# EAGLE board SparkFun_Tri_Axis_Accel_Breakout-LIS331_Panel_v12 (EAGLE 7.4.0), part 1 of 3
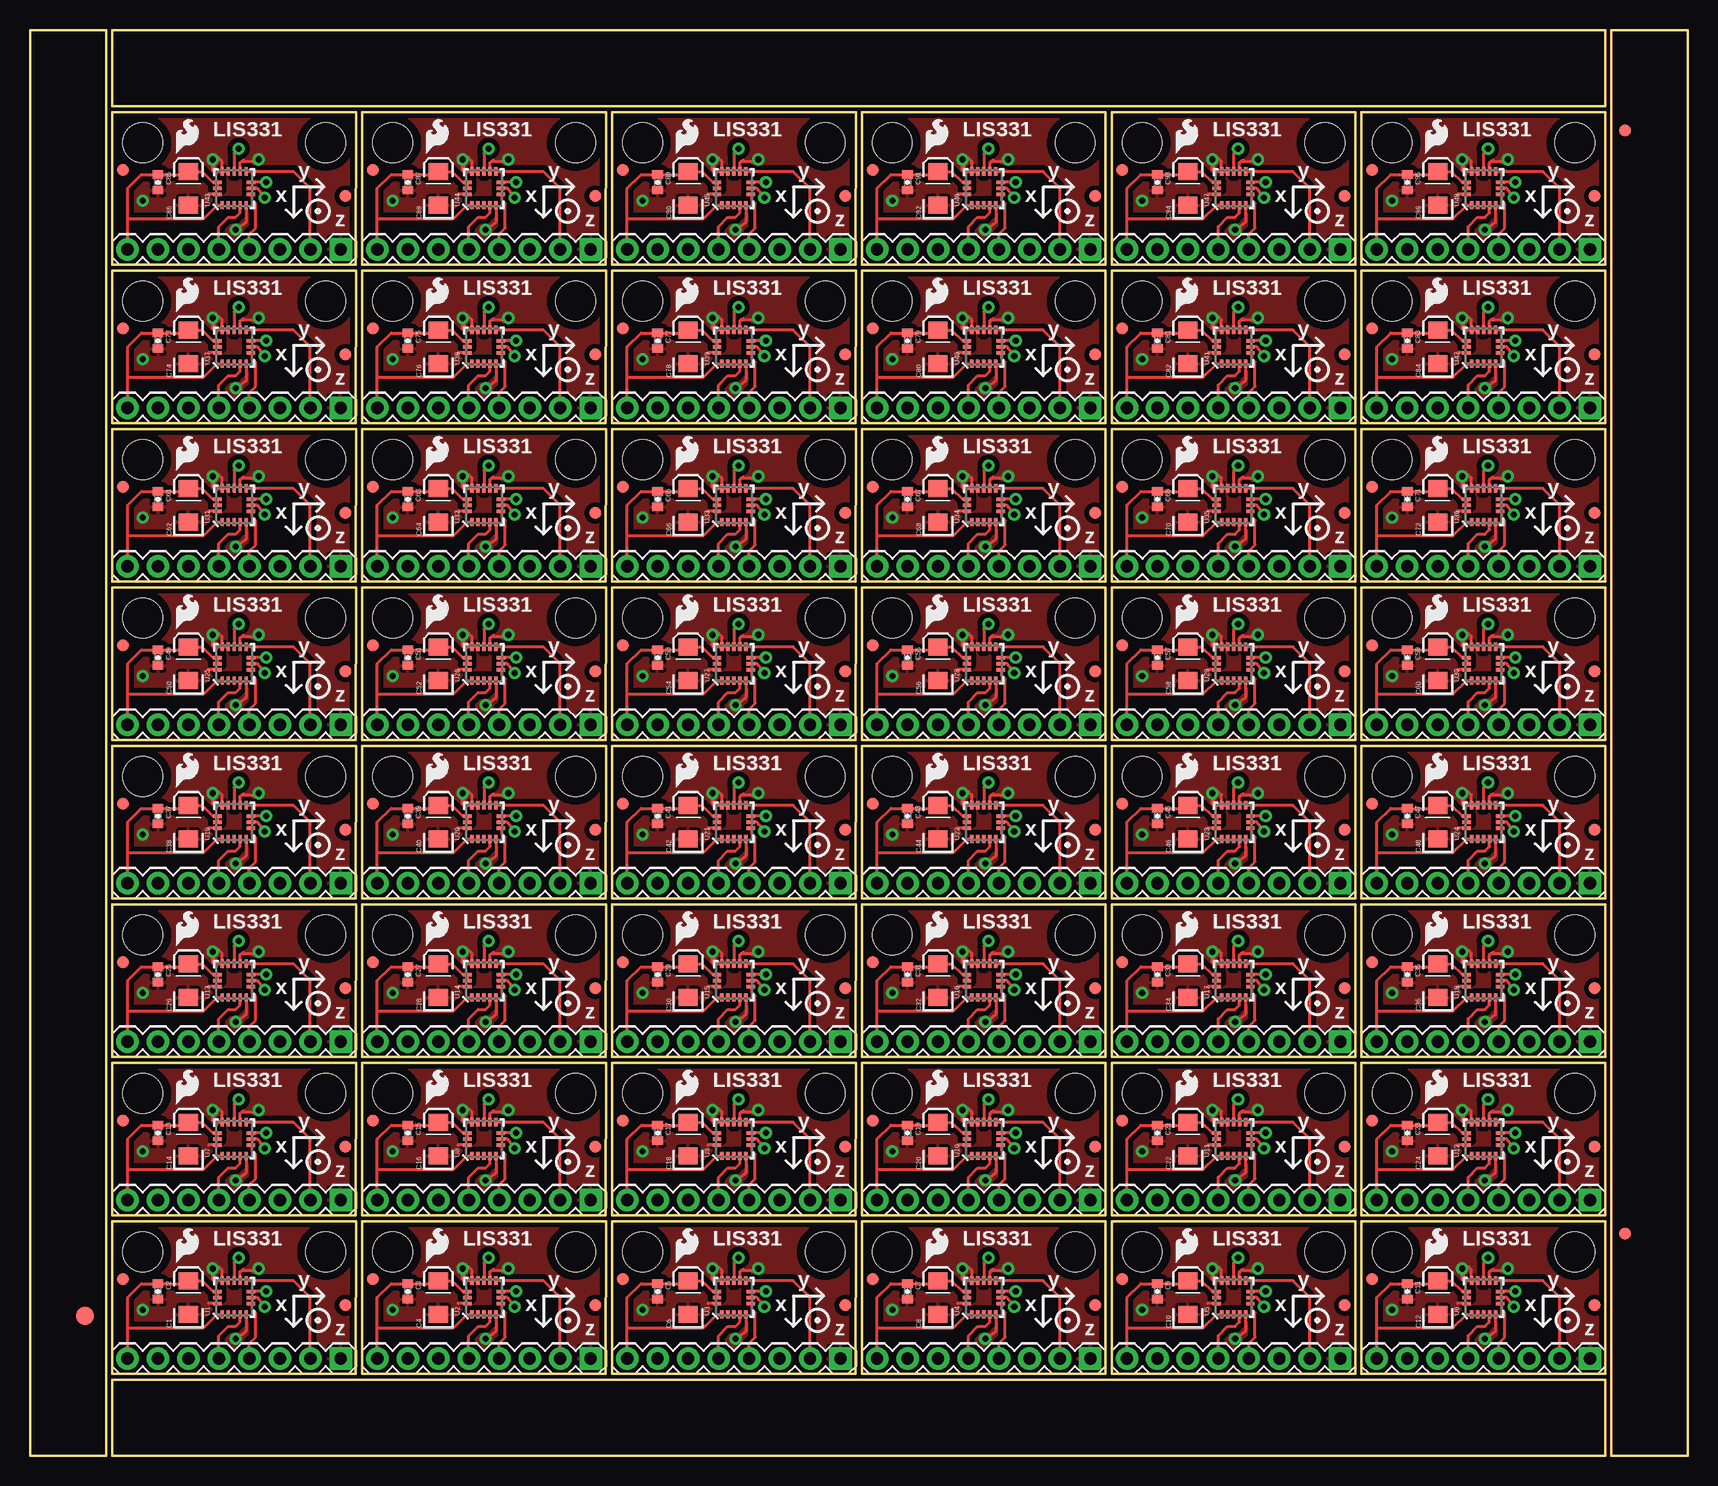
[diagram p0: board, top side]
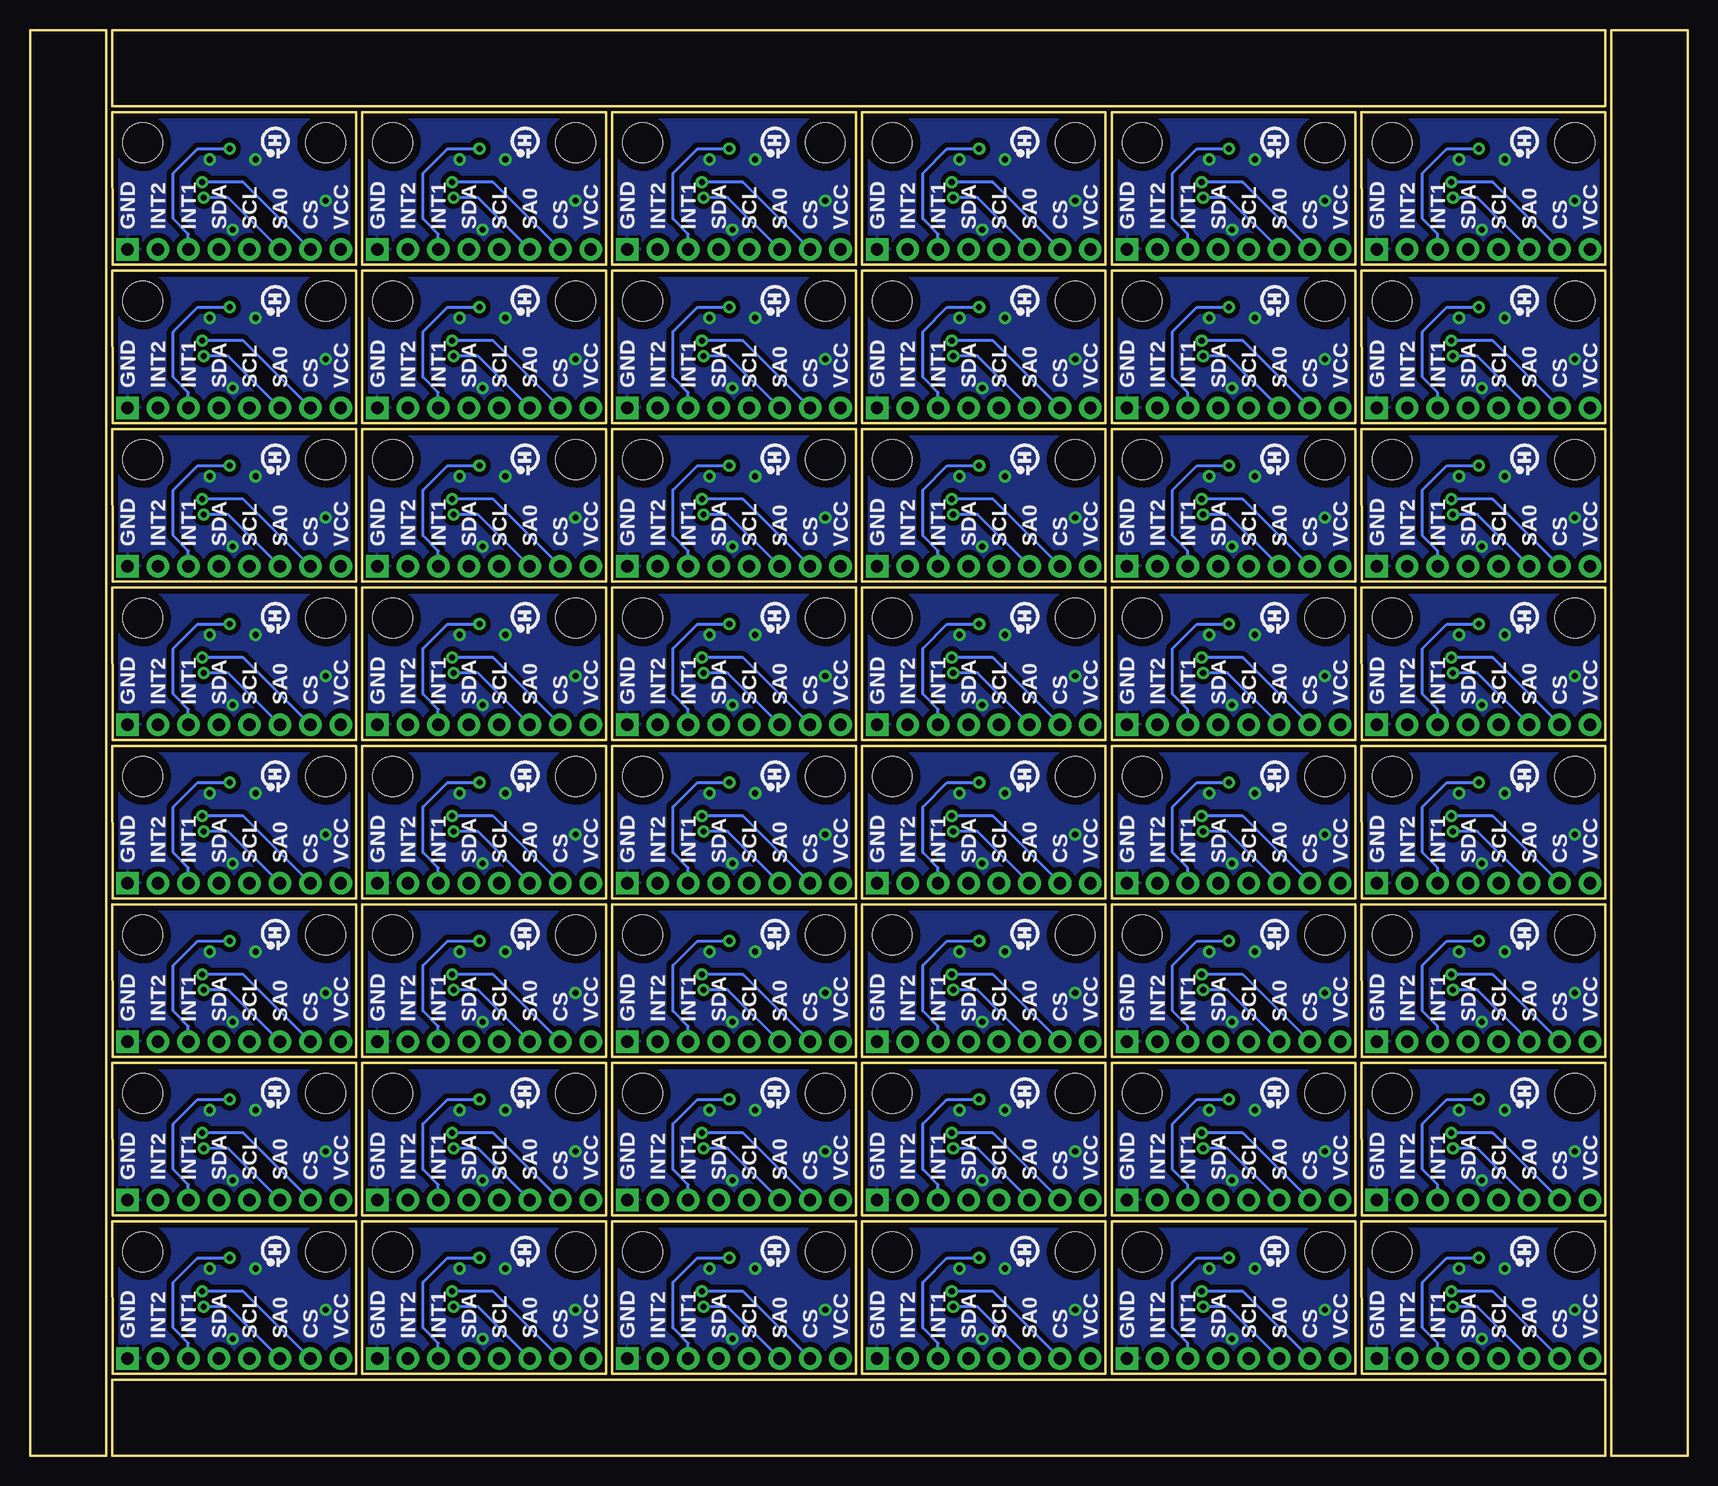
[diagram p1: board, bottom side, seen from below]

Size 138.18 x 118.87 mm. Coordinates in mm from the lower left corner, seen from the top.
Outline: 216 segments
Copper layers (1*16): Top 0.035mm / dielectric 1.5mm / Bottom 0.035mm
Design rules "SparkFun": minimum track width 8mil, minimum drill 20mil, track to track 8mil, track to pad 8mil, pad to pad 8mil, via to via 8mil, smd to smd 8mil, copper to edge 8mil, drill to drill 8mil, minimum pad ring 12mil, minimum via ring 10mil, stop-mask expansion 4mil, vias tented up to drill 20mil, thermal gap 10mil

## Footprints (pad centres in the part's own frame; a part is rotated, then mirrored left to right if it is on the bottom)
EIA3216 = smd 1.4 x 1.6: A 1.4,0; C -1.4,0
0402-CAP = smd 0.7 x 0.9: 1 -0.65,0; 2 0.65,0
FIDUCIAL-1.5X3 = smd 1.5 x 1.5: 1 0,0
FIDUCIAL-1X2 = smd 1 x 1: 1 0,0
1X08 = drill 1.016 pad 1.88 square: 1 0,0 | drill 1.016 pad 1.88: 2 2.54,0; 3 5.08,0; 4 7.62,0; 5 10.16,0; 6 12.7,0; 7 15.24,0; 8 17.78,0
STAND-OFF = hole 3.302: 0,0
LGA16-3MM = smd 0.7 x 0.28: 1 -1.4,1; 2 -1.4,0.5; 3 -1.4,0; 4 -1.4,-0.5; 5 -1.4,-1; 9 1.4,-1; 10 1.4,-0.5; 11 1.4,0; 12 1.4,0.5; 13 1.4,1 | smd 0.28 x 0.7: 6 -0.5,-1.4; 7 0,-1.4; 8 0.5,-1.4; 14 0.5,1.4; 15 0,1.4; 16 -0.5,1.4

## Placement (x,y rotation side)
C1  10uF  [EIA3216]  13.21,13.21 90 top
C2  0.1uF  [0402-CAP]  10.67,13.72 270 top
C3  0.1uF  [0402-CAP]  31.5,13.72 270 top
C4  10uF  [EIA3216]  34.04,13.21 90 top
C5  0.1uF  [0402-CAP]  52.32,13.72 270 top
C6  10uF  [EIA3216]  54.86,13.21 90 top
C7  0.1uF  [0402-CAP]  73.15,13.72 270 top
C8  10uF  [EIA3216]  75.69,13.21 90 top
C9  0.1uF  [0402-CAP]  93.98,13.72 270 top
C10  10uF  [EIA3216]  96.52,13.21 90 top
C11  0.1uF  [0402-CAP]  114.81,13.72 270 top
C12  10uF  [EIA3216]  117.35,13.21 90 top
C13  0.1uF  [0402-CAP]  10.67,26.92 270 top
C14  10uF  [EIA3216]  13.21,26.42 90 top
C15  0.1uF  [0402-CAP]  31.5,26.92 270 top
C16  10uF  [EIA3216]  34.04,26.42 90 top
C17  0.1uF  [0402-CAP]  52.32,26.92 270 top
C18  10uF  [EIA3216]  54.86,26.42 90 top
C19  0.1uF  [0402-CAP]  73.15,26.92 270 top
C20  10uF  [EIA3216]  75.69,26.42 90 top
C21  0.1uF  [0402-CAP]  93.98,26.92 270 top
C22  10uF  [EIA3216]  96.52,26.42 90 top
C23  0.1uF  [0402-CAP]  114.81,26.92 270 top
C24  10uF  [EIA3216]  117.35,26.42 90 top
C25  0.1uF  [0402-CAP]  10.67,40.13 270 top
C26  10uF  [EIA3216]  13.21,39.62 90 top
C27  0.1uF  [0402-CAP]  31.5,40.13 270 top
C28  10uF  [EIA3216]  34.04,39.62 90 top
C29  0.1uF  [0402-CAP]  52.32,40.13 270 top
C30  10uF  [EIA3216]  54.86,39.62 90 top
C31  0.1uF  [0402-CAP]  73.15,40.13 270 top
C32  10uF  [EIA3216]  75.69,39.62 90 top
C33  0.1uF  [0402-CAP]  93.98,40.13 270 top
C34  10uF  [EIA3216]  96.52,39.62 90 top
C35  0.1uF  [0402-CAP]  114.81,40.13 270 top
C36  10uF  [EIA3216]  117.35,39.62 90 top
C37  0.1uF  [0402-CAP]  10.67,53.34 270 top
C38  10uF  [EIA3216]  13.21,52.83 90 top
C39  0.1uF  [0402-CAP]  31.5,53.34 270 top
C40  10uF  [EIA3216]  34.04,52.83 90 top
C41  0.1uF  [0402-CAP]  52.32,53.34 270 top
C42  10uF  [EIA3216]  54.86,52.83 90 top
C43  0.1uF  [0402-CAP]  73.15,53.34 270 top
C44  10uF  [EIA3216]  75.69,52.83 90 top
C45  0.1uF  [0402-CAP]  93.98,53.34 270 top
C46  10uF  [EIA3216]  96.52,52.83 90 top
C47  0.1uF  [0402-CAP]  114.81,53.34 270 top
C48  10uF  [EIA3216]  117.35,52.83 90 top
C49  0.1uF  [0402-CAP]  10.67,66.55 270 top
C50  10uF  [EIA3216]  13.21,66.04 90 top
C51  0.1uF  [0402-CAP]  31.5,66.55 270 top
C52  10uF  [EIA3216]  34.04,66.04 90 top
C53  0.1uF  [0402-CAP]  52.32,66.55 270 top
C54  10uF  [EIA3216]  54.86,66.04 90 top
C55  0.1uF  [0402-CAP]  73.15,66.55 270 top
C56  10uF  [EIA3216]  75.69,66.04 90 top
C57  0.1uF  [0402-CAP]  93.98,66.55 270 top
C58  10uF  [EIA3216]  96.52,66.04 90 top
C59  0.1uF  [0402-CAP]  114.81,66.55 270 top
C60  10uF  [EIA3216]  117.35,66.04 90 top
C61  0.1uF  [0402-CAP]  10.67,79.76 270 top
C62  10uF  [EIA3216]  13.21,79.25 90 top
C63  0.1uF  [0402-CAP]  31.5,79.76 270 top
C64  10uF  [EIA3216]  34.04,79.25 90 top
C65  0.1uF  [0402-CAP]  52.32,79.76 270 top
C66  10uF  [EIA3216]  54.86,79.25 90 top
C67  0.1uF  [0402-CAP]  73.15,79.76 270 top
C68  10uF  [EIA3216]  75.69,79.25 90 top
C69  0.1uF  [0402-CAP]  93.98,79.76 270 top
C70  10uF  [EIA3216]  96.52,79.25 90 top
C71  0.1uF  [0402-CAP]  114.81,79.76 270 top
C72  10uF  [EIA3216]  117.35,79.25 90 top
C73  0.1uF  [0402-CAP]  10.67,92.96 270 top
C74  10uF  [EIA3216]  13.21,92.46 90 top
C75  0.1uF  [0402-CAP]  31.5,92.96 270 top
C76  10uF  [EIA3216]  34.04,92.46 90 top
C77  0.1uF  [0402-CAP]  52.32,92.96 270 top
C78  10uF  [EIA3216]  54.86,92.46 90 top
C79  0.1uF  [0402-CAP]  73.15,92.96 270 top
C80  10uF  [EIA3216]  75.69,92.46 90 top
C81  0.1uF  [0402-CAP]  93.98,92.96 270 top
C82  10uF  [EIA3216]  96.52,92.46 90 top
C83  0.1uF  [0402-CAP]  114.81,92.96 270 top
C84  10uF  [EIA3216]  117.35,92.46 90 top
C85  0.1uF  [0402-CAP]  10.67,106.17 270 top
C86  10uF  [EIA3216]  13.21,105.66 90 top
C87  0.1uF  [0402-CAP]  31.5,106.17 270 top
C88  10uF  [EIA3216]  34.04,105.66 90 top
C89  0.1uF  [0402-CAP]  52.32,106.17 270 top
C90  10uF  [EIA3216]  54.86,105.66 90 top
C91  0.1uF  [0402-CAP]  73.15,106.17 270 top
C92  10uF  [EIA3216]  75.69,105.66 90 top
C93  0.1uF  [0402-CAP]  93.98,106.17 270 top
C94  10uF  [EIA3216]  96.52,105.66 90 top
C95  0.1uF  [0402-CAP]  114.81,106.17 270 top
C96  10uF  [EIA3216]  117.35,105.66 90 top
E$1  [FIDUCIAL-1.5X3]  4.57,11.68 0 top
E$5  [FIDUCIAL-1X2]  132.97,18.54 0 top
E$6  [FIDUCIAL-1X2]  132.97,110.49 180 top
JP1  [1X08]  25.91,8.13 180 top
JP2  LOGO-SFESK  [SFE-LOGO-FLAME]  12.19,16.13 0 top
JP3  STAND-OFF  [STAND-OFF]  9.4,17.02 0 top
JP4  STAND-OFF  [STAND-OFF]  24.64,17.02 0 top
JP5  FIDUCIAL1X2  [FIDUCIAL-1X2]  7.75,14.73 0 top
JP6  FIDUCIAL1X2  [FIDUCIAL-1X2]  26.29,12.57 0 top
JP7  LOGO-SFESK  [SFE-LOGO-FLAME]  33.02,16.13 0 top
JP8  [1X08]  46.74,8.13 180 top
JP9  STAND-OFF  [STAND-OFF]  30.23,17.02 0 top
JP10  STAND-OFF  [STAND-OFF]  45.47,17.02 0 top
JP11  FIDUCIAL1X2  [FIDUCIAL-1X2]  28.57,14.73 0 top
JP12  FIDUCIAL1X2  [FIDUCIAL-1X2]  47.12,12.57 0 top
JP13  LOGO-SFESK  [SFE-LOGO-FLAME]  53.85,16.13 0 top
JP14  [1X08]  67.56,8.13 180 top
JP15  STAND-OFF  [STAND-OFF]  51.05,17.02 0 top
JP16  STAND-OFF  [STAND-OFF]  66.29,17.02 0 top
JP17  FIDUCIAL1X2  [FIDUCIAL-1X2]  49.4,14.73 0 top
JP18  FIDUCIAL1X2  [FIDUCIAL-1X2]  67.94,12.57 0 top
JP19  LOGO-SFESK  [SFE-LOGO-FLAME]  74.68,16.13 0 top
JP20  [1X08]  88.39,8.13 180 top
JP21  STAND-OFF  [STAND-OFF]  71.88,17.02 0 top
JP22  STAND-OFF  [STAND-OFF]  87.12,17.02 0 top
JP23  FIDUCIAL1X2  [FIDUCIAL-1X2]  70.23,14.73 0 top
JP24  FIDUCIAL1X2  [FIDUCIAL-1X2]  88.77,12.57 0 top
JP25  LOGO-SFESK  [SFE-LOGO-FLAME]  95.5,16.13 0 top
JP26  [1X08]  109.22,8.13 180 top
JP27  STAND-OFF  [STAND-OFF]  92.71,17.02 0 top
JP28  STAND-OFF  [STAND-OFF]  107.95,17.02 0 top
JP29  FIDUCIAL1X2  [FIDUCIAL-1X2]  91.06,14.73 0 top
JP30  FIDUCIAL1X2  [FIDUCIAL-1X2]  109.6,12.57 0 top
JP31  LOGO-SFESK  [SFE-LOGO-FLAME]  116.33,16.13 0 top
JP32  [1X08]  130.05,8.13 180 top
JP33  STAND-OFF  [STAND-OFF]  113.54,17.02 0 top
JP34  STAND-OFF  [STAND-OFF]  128.78,17.02 0 top
JP35  FIDUCIAL1X2  [FIDUCIAL-1X2]  111.89,14.73 0 top
JP36  FIDUCIAL1X2  [FIDUCIAL-1X2]  130.43,12.57 0 top
JP37  LOGO-SFESK  [SFE-LOGO-FLAME]  12.19,29.34 0 top
JP38  [1X08]  25.91,21.34 180 top
JP39  STAND-OFF  [STAND-OFF]  9.4,30.23 0 top
JP40  STAND-OFF  [STAND-OFF]  24.64,30.23 0 top
JP41  FIDUCIAL1X2  [FIDUCIAL-1X2]  7.75,27.94 0 top
JP42  FIDUCIAL1X2  [FIDUCIAL-1X2]  26.29,25.78 0 top
JP43  LOGO-SFESK  [SFE-LOGO-FLAME]  33.02,29.34 0 top
JP44  [1X08]  46.74,21.34 180 top
JP45  STAND-OFF  [STAND-OFF]  30.23,30.23 0 top
JP46  STAND-OFF  [STAND-OFF]  45.47,30.23 0 top
JP47  FIDUCIAL1X2  [FIDUCIAL-1X2]  28.57,27.94 0 top
JP48  FIDUCIAL1X2  [FIDUCIAL-1X2]  47.12,25.78 0 top
JP49  LOGO-SFESK  [SFE-LOGO-FLAME]  53.85,29.34 0 top
JP50  [1X08]  67.56,21.34 180 top
JP51  STAND-OFF  [STAND-OFF]  51.05,30.23 0 top
JP52  STAND-OFF  [STAND-OFF]  66.29,30.23 0 top
JP53  FIDUCIAL1X2  [FIDUCIAL-1X2]  49.4,27.94 0 top
JP54  FIDUCIAL1X2  [FIDUCIAL-1X2]  67.94,25.78 0 top
JP55  LOGO-SFESK  [SFE-LOGO-FLAME]  74.68,29.34 0 top
JP56  [1X08]  88.39,21.34 180 top
JP57  STAND-OFF  [STAND-OFF]  71.88,30.23 0 top
JP58  STAND-OFF  [STAND-OFF]  87.12,30.23 0 top
JP59  FIDUCIAL1X2  [FIDUCIAL-1X2]  70.23,27.94 0 top
JP60  FIDUCIAL1X2  [FIDUCIAL-1X2]  88.77,25.78 0 top
JP61  LOGO-SFESK  [SFE-LOGO-FLAME]  95.5,29.34 0 top
JP62  [1X08]  109.22,21.34 180 top
JP63  STAND-OFF  [STAND-OFF]  92.71,30.23 0 top
JP64  STAND-OFF  [STAND-OFF]  107.95,30.23 0 top
JP65  FIDUCIAL1X2  [FIDUCIAL-1X2]  91.06,27.94 0 top
JP66  FIDUCIAL1X2  [FIDUCIAL-1X2]  109.6,25.78 0 top
JP67  LOGO-SFESK  [SFE-LOGO-FLAME]  116.33,29.34 0 top
JP68  [1X08]  130.05,21.34 180 top
JP69  STAND-OFF  [STAND-OFF]  113.54,30.23 0 top
JP70  STAND-OFF  [STAND-OFF]  128.78,30.23 0 top
JP71  FIDUCIAL1X2  [FIDUCIAL-1X2]  111.89,27.94 0 top
JP72  FIDUCIAL1X2  [FIDUCIAL-1X2]  130.43,25.78 0 top
JP73  LOGO-SFESK  [SFE-LOGO-FLAME]  12.19,42.55 0 top
JP74  [1X08]  25.91,34.54 180 top
JP75  STAND-OFF  [STAND-OFF]  9.4,43.43 0 top
JP76  STAND-OFF  [STAND-OFF]  24.64,43.43 0 top
JP77  FIDUCIAL1X2  [FIDUCIAL-1X2]  7.75,41.15 0 top
JP78  FIDUCIAL1X2  [FIDUCIAL-1X2]  26.29,38.99 0 top
JP79  LOGO-SFESK  [SFE-LOGO-FLAME]  33.02,42.55 0 top
JP80  [1X08]  46.74,34.54 180 top
JP81  STAND-OFF  [STAND-OFF]  30.23,43.43 0 top
JP82  STAND-OFF  [STAND-OFF]  45.47,43.43 0 top
JP83  FIDUCIAL1X2  [FIDUCIAL-1X2]  28.57,41.15 0 top
JP84  FIDUCIAL1X2  [FIDUCIAL-1X2]  47.12,38.99 0 top
JP85  LOGO-SFESK  [SFE-LOGO-FLAME]  53.85,42.55 0 top
JP86  [1X08]  67.56,34.54 180 top
JP87  STAND-OFF  [STAND-OFF]  51.05,43.43 0 top
JP88  STAND-OFF  [STAND-OFF]  66.29,43.43 0 top
JP89  FIDUCIAL1X2  [FIDUCIAL-1X2]  49.4,41.15 0 top
JP90  FIDUCIAL1X2  [FIDUCIAL-1X2]  67.94,38.99 0 top
JP91  LOGO-SFESK  [SFE-LOGO-FLAME]  74.68,42.55 0 top
JP92  [1X08]  88.39,34.54 180 top
JP93  STAND-OFF  [STAND-OFF]  71.88,43.43 0 top
JP94  STAND-OFF  [STAND-OFF]  87.12,43.43 0 top
JP95  FIDUCIAL1X2  [FIDUCIAL-1X2]  70.23,41.15 0 top
JP96  FIDUCIAL1X2  [FIDUCIAL-1X2]  88.77,38.99 0 top
JP97  LOGO-SFESK  [SFE-LOGO-FLAME]  95.5,42.55 0 top
JP98  [1X08]  109.22,34.54 180 top
JP99  STAND-OFF  [STAND-OFF]  92.71,43.43 0 top
JP100  STAND-OFF  [STAND-OFF]  107.95,43.43 0 top
JP101  FIDUCIAL1X2  [FIDUCIAL-1X2]  91.06,41.15 0 top
JP102  FIDUCIAL1X2  [FIDUCIAL-1X2]  109.6,38.99 0 top
JP103  LOGO-SFESK  [SFE-LOGO-FLAME]  116.33,42.55 0 top
JP104  [1X08]  130.05,34.54 180 top
JP105  STAND-OFF  [STAND-OFF]  113.54,43.43 0 top
JP106  STAND-OFF  [STAND-OFF]  128.78,43.43 0 top
JP107  FIDUCIAL1X2  [FIDUCIAL-1X2]  111.89,41.15 0 top
JP108  FIDUCIAL1X2  [FIDUCIAL-1X2]  130.43,38.99 0 top
JP109  LOGO-SFESK  [SFE-LOGO-FLAME]  12.19,55.75 0 top
JP110  [1X08]  25.91,47.75 180 top
JP111  STAND-OFF  [STAND-OFF]  9.4,56.64 0 top
JP112  STAND-OFF  [STAND-OFF]  24.64,56.64 0 top
JP113  FIDUCIAL1X2  [FIDUCIAL-1X2]  7.75,54.36 0 top
JP114  FIDUCIAL1X2  [FIDUCIAL-1X2]  26.29,52.2 0 top
JP115  LOGO-SFESK  [SFE-LOGO-FLAME]  33.02,55.75 0 top
JP116  [1X08]  46.74,47.75 180 top
JP117  STAND-OFF  [STAND-OFF]  30.23,56.64 0 top
JP118  STAND-OFF  [STAND-OFF]  45.47,56.64 0 top
JP119  FIDUCIAL1X2  [FIDUCIAL-1X2]  28.57,54.36 0 top
JP120  FIDUCIAL1X2  [FIDUCIAL-1X2]  47.12,52.2 0 top
JP121  LOGO-SFESK  [SFE-LOGO-FLAME]  53.85,55.75 0 top
JP122  [1X08]  67.56,47.75 180 top
JP123  STAND-OFF  [STAND-OFF]  51.05,56.64 0 top
JP124  STAND-OFF  [STAND-OFF]  66.29,56.64 0 top
JP125  FIDUCIAL1X2  [FIDUCIAL-1X2]  49.4,54.36 0 top
JP126  FIDUCIAL1X2  [FIDUCIAL-1X2]  67.94,52.2 0 top
JP127  LOGO-SFESK  [SFE-LOGO-FLAME]  74.68,55.75 0 top
JP128  [1X08]  88.39,47.75 180 top
JP129  STAND-OFF  [STAND-OFF]  71.88,56.64 0 top
JP130  STAND-OFF  [STAND-OFF]  87.12,56.64 0 top
JP131  FIDUCIAL1X2  [FIDUCIAL-1X2]  70.23,54.36 0 top
JP132  FIDUCIAL1X2  [FIDUCIAL-1X2]  88.77,52.2 0 top
JP133  LOGO-SFESK  [SFE-LOGO-FLAME]  95.5,55.75 0 top
JP134  [1X08]  109.22,47.75 180 top
JP135  STAND-OFF  [STAND-OFF]  92.71,56.64 0 top
JP136  STAND-OFF  [STAND-OFF]  107.95,56.64 0 top
JP137  FIDUCIAL1X2  [FIDUCIAL-1X2]  91.06,54.36 0 top
JP138  FIDUCIAL1X2  [FIDUCIAL-1X2]  109.6,52.2 0 top
JP139  LOGO-SFESK  [SFE-LOGO-FLAME]  116.33,55.75 0 top
JP140  [1X08]  130.05,47.75 180 top
JP141  STAND-OFF  [STAND-OFF]  113.54,56.64 0 top
JP142  STAND-OFF  [STAND-OFF]  128.78,56.64 0 top
JP143  FIDUCIAL1X2  [FIDUCIAL-1X2]  111.89,54.36 0 top
JP144  FIDUCIAL1X2  [FIDUCIAL-1X2]  130.43,52.2 0 top
JP145  LOGO-SFESK  [SFE-LOGO-FLAME]  12.19,68.96 0 top
JP146  [1X08]  25.91,60.96 180 top
JP147  STAND-OFF  [STAND-OFF]  9.4,69.85 0 top
JP148  STAND-OFF  [STAND-OFF]  24.64,69.85 0 top
JP149  FIDUCIAL1X2  [FIDUCIAL-1X2]  7.75,67.56 0 top
JP150  FIDUCIAL1X2  [FIDUCIAL-1X2]  26.29,65.41 0 top
JP151  LOGO-SFESK  [SFE-LOGO-FLAME]  33.02,68.96 0 top
JP152  [1X08]  46.74,60.96 180 top
JP153  STAND-OFF  [STAND-OFF]  30.23,69.85 0 top
JP154  STAND-OFF  [STAND-OFF]  45.47,69.85 0 top
JP155  FIDUCIAL1X2  [FIDUCIAL-1X2]  28.57,67.56 0 top
JP156  FIDUCIAL1X2  [FIDUCIAL-1X2]  47.12,65.41 0 top
JP157  LOGO-SFESK  [SFE-LOGO-FLAME]  53.85,68.96 0 top
JP158  [1X08]  67.56,60.96 180 top
JP159  STAND-OFF  [STAND-OFF]  51.05,69.85 0 top
JP160  STAND-OFF  [STAND-OFF]  66.29,69.85 0 top
JP161  FIDUCIAL1X2  [FIDUCIAL-1X2]  49.4,67.56 0 top
JP162  FIDUCIAL1X2  [FIDUCIAL-1X2]  67.94,65.41 0 top
JP163  LOGO-SFESK  [SFE-LOGO-FLAME]  74.68,68.96 0 top
JP164  [1X08]  88.39,60.96 180 top
JP165  STAND-OFF  [STAND-OFF]  71.88,69.85 0 top
JP166  STAND-OFF  [STAND-OFF]  87.12,69.85 0 top
JP167  FIDUCIAL1X2  [FIDUCIAL-1X2]  70.23,67.56 0 top
JP168  FIDUCIAL1X2  [FIDUCIAL-1X2]  88.77,65.41 0 top
JP169  LOGO-SFESK  [SFE-LOGO-FLAME]  95.5,68.96 0 top
JP170  [1X08]  109.22,60.96 180 top
JP171  STAND-OFF  [STAND-OFF]  92.71,69.85 0 top
JP172  STAND-OFF  [STAND-OFF]  107.95,69.85 0 top
JP173  FIDUCIAL1X2  [FIDUCIAL-1X2]  91.06,67.56 0 top
JP174  FIDUCIAL1X2  [FIDUCIAL-1X2]  109.6,65.41 0 top
JP175  LOGO-SFESK  [SFE-LOGO-FLAME]  116.33,68.96 0 top
JP176  [1X08]  130.05,60.96 180 top
JP177  STAND-OFF  [STAND-OFF]  113.54,69.85 0 top
JP178  STAND-OFF  [STAND-OFF]  128.78,69.85 0 top
JP179  FIDUCIAL1X2  [FIDUCIAL-1X2]  111.89,67.56 0 top
JP180  FIDUCIAL1X2  [FIDUCIAL-1X2]  130.43,65.41 0 top
JP181  LOGO-SFESK  [SFE-LOGO-FLAME]  12.19,82.17 0 top
JP182  [1X08]  25.91,74.17 180 top
JP183  STAND-OFF  [STAND-OFF]  9.4,83.06 0 top
JP184  STAND-OFF  [STAND-OFF]  24.64,83.06 0 top
JP185  FIDUCIAL1X2  [FIDUCIAL-1X2]  7.75,80.77 0 top
JP186  FIDUCIAL1X2  [FIDUCIAL-1X2]  26.29,78.61 0 top
JP187  LOGO-SFESK  [SFE-LOGO-FLAME]  33.02,82.17 0 top
JP188  [1X08]  46.74,74.17 180 top
JP189  STAND-OFF  [STAND-OFF]  30.23,83.06 0 top
JP190  STAND-OFF  [STAND-OFF]  45.47,83.06 0 top
JP191  FIDUCIAL1X2  [FIDUCIAL-1X2]  28.57,80.77 0 top
JP192  FIDUCIAL1X2  [FIDUCIAL-1X2]  47.12,78.61 0 top
JP193  LOGO-SFESK  [SFE-LOGO-FLAME]  53.85,82.17 0 top
JP194  [1X08]  67.56,74.17 180 top
JP195  STAND-OFF  [STAND-OFF]  51.05,83.06 0 top
JP196  STAND-OFF  [STAND-OFF]  66.29,83.06 0 top
JP197  FIDUCIAL1X2  [FIDUCIAL-1X2]  49.4,80.77 0 top
JP198  FIDUCIAL1X2  [FIDUCIAL-1X2]  67.94,78.61 0 top
JP199  LOGO-SFESK  [SFE-LOGO-FLAME]  74.68,82.17 0 top
JP200  [1X08]  88.39,74.17 180 top
JP201  STAND-OFF  [STAND-OFF]  71.88,83.06 0 top
JP202  STAND-OFF  [STAND-OFF]  87.12,83.06 0 top
JP203  FIDUCIAL1X2  [FIDUCIAL-1X2]  70.23,80.77 0 top
JP204  FIDUCIAL1X2  [FIDUCIAL-1X2]  88.77,78.61 0 top
JP205  LOGO-SFESK  [SFE-LOGO-FLAME]  95.5,82.17 0 top
JP206  [1X08]  109.22,74.17 180 top
JP207  STAND-OFF  [STAND-OFF]  92.71,83.06 0 top
JP208  STAND-OFF  [STAND-OFF]  107.95,83.06 0 top
JP209  FIDUCIAL1X2  [FIDUCIAL-1X2]  91.06,80.77 0 top
JP210  FIDUCIAL1X2  [FIDUCIAL-1X2]  109.6,78.61 0 top
JP211  LOGO-SFESK  [SFE-LOGO-FLAME]  116.33,82.17 0 top
JP212  [1X08]  130.05,74.17 180 top
JP213  STAND-OFF  [STAND-OFF]  113.54,83.06 0 top
JP214  STAND-OFF  [STAND-OFF]  128.78,83.06 0 top
JP215  FIDUCIAL1X2  [FIDUCIAL-1X2]  111.89,80.77 0 top
JP216  FIDUCIAL1X2  [FIDUCIAL-1X2]  130.43,78.61 0 top
JP217  LOGO-SFESK  [SFE-LOGO-FLAME]  12.19,95.38 0 top
JP218  [1X08]  25.91,87.38 180 top
JP219  STAND-OFF  [STAND-OFF]  9.4,96.27 0 top
JP220  STAND-OFF  [STAND-OFF]  24.64,96.27 0 top
JP221  FIDUCIAL1X2  [FIDUCIAL-1X2]  7.75,93.98 0 top
JP222  FIDUCIAL1X2  [FIDUCIAL-1X2]  26.29,91.82 0 top
JP223  LOGO-SFESK  [SFE-LOGO-FLAME]  33.02,95.38 0 top
JP224  [1X08]  46.74,87.38 180 top
JP225  STAND-OFF  [STAND-OFF]  30.23,96.27 0 top
JP226  STAND-OFF  [STAND-OFF]  45.47,96.27 0 top
JP227  FIDUCIAL1X2  [FIDUCIAL-1X2]  28.57,93.98 0 top
JP228  FIDUCIAL1X2  [FIDUCIAL-1X2]  47.12,91.82 0 top
JP229  LOGO-SFESK  [SFE-LOGO-FLAME]  53.85,95.38 0 top
JP230  [1X08]  67.56,87.38 180 top
JP231  STAND-OFF  [STAND-OFF]  51.05,96.27 0 top
JP232  STAND-OFF  [STAND-OFF]  66.29,96.27 0 top
JP233  FIDUCIAL1X2  [FIDUCIAL-1X2]  49.4,93.98 0 top
JP234  FIDUCIAL1X2  [FIDUCIAL-1X2]  67.94,91.82 0 top
JP235  LOGO-SFESK  [SFE-LOGO-FLAME]  74.68,95.38 0 top
JP236  [1X08]  88.39,87.38 180 top
JP237  STAND-OFF  [STAND-OFF]  71.88,96.27 0 top
JP238  STAND-OFF  [STAND-OFF]  87.12,96.27 0 top
JP239  FIDUCIAL1X2  [FIDUCIAL-1X2]  70.23,93.98 0 top
JP240  FIDUCIAL1X2  [FIDUCIAL-1X2]  88.77,91.82 0 top
JP241  LOGO-SFESK  [SFE-LOGO-FLAME]  95.5,95.38 0 top
JP242  [1X08]  109.22,87.38 180 top
JP243  STAND-OFF  [STAND-OFF]  92.71,96.27 0 top
JP244  STAND-OFF  [STAND-OFF]  107.95,96.27 0 top
JP245  FIDUCIAL1X2  [FIDUCIAL-1X2]  91.06,93.98 0 top
JP246  FIDUCIAL1X2  [FIDUCIAL-1X2]  109.6,91.82 0 top
JP247  LOGO-SFESK  [SFE-LOGO-FLAME]  116.33,95.38 0 top
JP248  [1X08]  130.05,87.38 180 top
JP249  STAND-OFF  [STAND-OFF]  113.54,96.27 0 top
JP250  STAND-OFF  [STAND-OFF]  128.78,96.27 0 top
JP251  FIDUCIAL1X2  [FIDUCIAL-1X2]  111.89,93.98 0 top
JP252  FIDUCIAL1X2  [FIDUCIAL-1X2]  130.43,91.82 0 top
JP253  LOGO-SFESK  [SFE-LOGO-FLAME]  12.19,108.58 0 top
JP254  [1X08]  25.91,100.58 180 top
JP255  STAND-OFF  [STAND-OFF]  9.4,109.47 0 top
JP256  STAND-OFF  [STAND-OFF]  24.64,109.47 0 top
JP257  FIDUCIAL1X2  [FIDUCIAL-1X2]  7.75,107.19 0 top
JP258  FIDUCIAL1X2  [FIDUCIAL-1X2]  26.29,105.03 0 top
JP259  LOGO-SFESK  [SFE-LOGO-FLAME]  33.02,108.58 0 top
JP260  [1X08]  46.74,100.58 180 top
JP261  STAND-OFF  [STAND-OFF]  30.23,109.47 0 top
JP262  STAND-OFF  [STAND-OFF]  45.47,109.47 0 top
JP263  FIDUCIAL1X2  [FIDUCIAL-1X2]  28.57,107.19 0 top
JP264  FIDUCIAL1X2  [FIDUCIAL-1X2]  47.12,105.03 0 top
JP265  LOGO-SFESK  [SFE-LOGO-FLAME]  53.85,108.58 0 top
JP266  [1X08]  67.56,100.58 180 top
JP267  STAND-OFF  [STAND-OFF]  51.05,109.47 0 top
JP268  STAND-OFF  [STAND-OFF]  66.29,109.47 0 top
JP269  FIDUCIAL1X2  [FIDUCIAL-1X2]  49.4,107.19 0 top
JP270  FIDUCIAL1X2  [FIDUCIAL-1X2]  67.94,105.03 0 top
JP271  LOGO-SFESK  [SFE-LOGO-FLAME]  74.68,108.58 0 top
JP272  [1X08]  88.39,100.58 180 top
JP273  STAND-OFF  [STAND-OFF]  71.88,109.47 0 top
JP274  STAND-OFF  [STAND-OFF]  87.12,109.47 0 top
JP275  FIDUCIAL1X2  [FIDUCIAL-1X2]  70.23,107.19 0 top
JP276  FIDUCIAL1X2  [FIDUCIAL-1X2]  88.77,105.03 0 top
JP277  LOGO-SFESK  [SFE-LOGO-FLAME]  95.5,108.58 0 top
JP278  [1X08]  109.22,100.58 180 top
JP279  STAND-OFF  [STAND-OFF]  92.71,109.47 0 top
JP280  STAND-OFF  [STAND-OFF]  107.95,109.47 0 top
JP281  FIDUCIAL1X2  [FIDUCIAL-1X2]  91.06,107.19 0 top
JP282  FIDUCIAL1X2  [FIDUCIAL-1X2]  109.6,105.03 0 top
JP283  LOGO-SFESK  [SFE-LOGO-FLAME]  116.33,108.58 0 top
JP284  [1X08]  130.05,100.58 180 top
JP285  STAND-OFF  [STAND-OFF]  113.54,109.47 0 top
JP286  STAND-OFF  [STAND-OFF]  128.78,109.47 0 top
JP287  FIDUCIAL1X2  [FIDUCIAL-1X2]  111.89,107.19 0 top
JP288  FIDUCIAL1X2  [FIDUCIAL-1X2]  130.43,105.03 0 top
U1  LIS331  [LGA16-3MM]  17.02,13.21 90 top
U2  LIS331  [LGA16-3MM]  37.85,13.21 90 top
U3  LIS331  [LGA16-3MM]  58.67,13.21 90 top
U4  LIS331  [LGA16-3MM]  79.5,13.21 90 top
U5  LIS331  [LGA16-3MM]  100.33,13.21 90 top
U6  LIS331  [LGA16-3MM]  121.16,13.21 90 top
U7  LIS331  [LGA16-3MM]  17.02,26.42 90 top
U8  LIS331  [LGA16-3MM]  37.85,26.42 90 top
U9  LIS331  [LGA16-3MM]  58.67,26.42 90 top
U10  LIS331  [LGA16-3MM]  79.5,26.42 90 top
U11  LIS331  [LGA16-3MM]  100.33,26.42 90 top
U12  LIS331  [LGA16-3MM]  121.16,26.42 90 top
U13  LIS331  [LGA16-3MM]  17.02,39.62 90 top
U14  LIS331  [LGA16-3MM]  37.85,39.62 90 top
U15  LIS331  [LGA16-3MM]  58.67,39.62 90 top
U16  LIS331  [LGA16-3MM]  79.5,39.62 90 top
U17  LIS331  [LGA16-3MM]  100.33,39.62 90 top
U18  LIS331  [LGA16-3MM]  121.16,39.62 90 top
U19  LIS331  [LGA16-3MM]  17.02,52.83 90 top
U20  LIS331  [LGA16-3MM]  37.85,52.83 90 top
U21  LIS331  [LGA16-3MM]  58.67,52.83 90 top
U22  LIS331  [LGA16-3MM]  79.5,52.83 90 top
U23  LIS331  [LGA16-3MM]  100.33,52.83 90 top
U24  LIS331  [LGA16-3MM]  121.16,52.83 90 top
U25  LIS331  [LGA16-3MM]  17.02,66.04 90 top
U26  LIS331  [LGA16-3MM]  37.85,66.04 90 top
U27  LIS331  [LGA16-3MM]  58.67,66.04 90 top
U28  LIS331  [LGA16-3MM]  79.5,66.04 90 top
U29  LIS331  [LGA16-3MM]  100.33,66.04 90 top
U30  LIS331  [LGA16-3MM]  121.16,66.04 90 top
U31  LIS331  [LGA16-3MM]  17.02,79.25 90 top
U32  LIS331  [LGA16-3MM]  37.85,79.25 90 top
U33  LIS331  [LGA16-3MM]  58.67,79.25 90 top
U34  LIS331  [LGA16-3MM]  79.5,79.25 90 top
U35  LIS331  [LGA16-3MM]  100.33,79.25 90 top
U36  LIS331  [LGA16-3MM]  121.16,79.25 90 top
U37  LIS331  [LGA16-3MM]  17.02,92.46 90 top
U38  LIS331  [LGA16-3MM]  37.85,92.46 90 top
U39  LIS331  [LGA16-3MM]  58.67,92.46 90 top
U40  LIS331  [LGA16-3MM]  79.5,92.46 90 top
U41  LIS331  [LGA16-3MM]  100.33,92.46 90 top
U42  LIS331  [LGA16-3MM]  121.16,92.46 90 top
U43  LIS331  [LGA16-3MM]  17.02,105.66 90 top
U44  LIS331  [LGA16-3MM]  37.85,105.66 90 top
U45  LIS331  [LGA16-3MM]  58.67,105.66 90 top
U46  LIS331  [LGA16-3MM]  79.5,105.66 90 top
U47  LIS331  [LGA16-3MM]  100.33,105.66 90 top
U48  LIS331  [LGA16-3MM]  121.16,105.66 90 top
U$1  OSHW-LOGO-SMALL  [OSHW-LOGO-SMALL]  13.59,17.14 270 bottom
U$2  OSHW-LOGO-SMALL  [OSHW-LOGO-SMALL]  34.42,17.14 270 bottom
U$3  OSHW-LOGO-SMALL  [OSHW-LOGO-SMALL]  55.24,17.14 270 bottom
U$4  OSHW-LOGO-SMALL  [OSHW-LOGO-SMALL]  76.07,17.14 270 bottom
U$5  OSHW-LOGO-SMALL  [OSHW-LOGO-SMALL]  96.9,17.14 270 bottom
U$6  OSHW-LOGO-SMALL  [OSHW-LOGO-SMALL]  117.73,17.14 270 bottom
U$7  OSHW-LOGO-SMALL  [OSHW-LOGO-SMALL]  13.59,30.35 270 bottom
U$8  OSHW-LOGO-SMALL  [OSHW-LOGO-SMALL]  34.42,30.35 270 bottom
U$9  OSHW-LOGO-SMALL  [OSHW-LOGO-SMALL]  55.24,30.35 270 bottom
U$10  OSHW-LOGO-SMALL  [OSHW-LOGO-SMALL]  76.07,30.35 270 bottom
U$11  OSHW-LOGO-SMALL  [OSHW-LOGO-SMALL]  96.9,30.35 270 bottom
U$12  OSHW-LOGO-SMALL  [OSHW-LOGO-SMALL]  117.73,30.35 270 bottom
U$13  OSHW-LOGO-SMALL  [OSHW-LOGO-SMALL]  13.59,43.56 270 bottom
U$14  OSHW-LOGO-SMALL  [OSHW-LOGO-SMALL]  34.42,43.56 270 bottom
U$15  OSHW-LOGO-SMALL  [OSHW-LOGO-SMALL]  55.24,43.56 270 bottom
U$16  OSHW-LOGO-SMALL  [OSHW-LOGO-SMALL]  76.07,43.56 270 bottom
U$17  OSHW-LOGO-SMALL  [OSHW-LOGO-SMALL]  96.9,43.56 270 bottom
U$18  OSHW-LOGO-SMALL  [OSHW-LOGO-SMALL]  117.73,43.56 270 bottom
U$19  OSHW-LOGO-SMALL  [OSHW-LOGO-SMALL]  13.59,56.77 270 bottom
U$20  OSHW-LOGO-SMALL  [OSHW-LOGO-SMALL]  34.42,56.77 270 bottom
U$21  OSHW-LOGO-SMALL  [OSHW-LOGO-SMALL]  55.24,56.77 270 bottom
U$22  OSHW-LOGO-SMALL  [OSHW-LOGO-SMALL]  76.07,56.77 270 bottom
U$23  OSHW-LOGO-SMALL  [OSHW-LOGO-SMALL]  96.9,56.77 270 bottom
U$24  OSHW-LOGO-SMALL  [OSHW-LOGO-SMALL]  117.73,56.77 270 bottom
U$25  OSHW-LOGO-SMALL  [OSHW-LOGO-SMALL]  13.59,69.98 270 bottom
U$26  OSHW-LOGO-SMALL  [OSHW-LOGO-SMALL]  34.42,69.98 270 bottom
U$27  OSHW-LOGO-SMALL  [OSHW-LOGO-SMALL]  55.24,69.98 270 bottom
U$28  OSHW-LOGO-SMALL  [OSHW-LOGO-SMALL]  76.07,69.98 270 bottom
U$29  OSHW-LOGO-SMALL  [OSHW-LOGO-SMALL]  96.9,69.98 270 bottom
U$30  OSHW-LOGO-SMALL  [OSHW-LOGO-SMALL]  117.73,69.98 270 bottom
U$31  OSHW-LOGO-SMALL  [OSHW-LOGO-SMALL]  13.59,83.19 270 bottom
U$32  OSHW-LOGO-SMALL  [OSHW-LOGO-SMALL]  34.42,83.19 270 bottom
U$33  OSHW-LOGO-SMALL  [OSHW-LOGO-SMALL]  55.24,83.19 270 bottom
U$34  OSHW-LOGO-SMALL  [OSHW-LOGO-SMALL]  76.07,83.19 270 bottom
U$35  OSHW-LOGO-SMALL  [OSHW-LOGO-SMALL]  96.9,83.19 270 bottom
U$36  OSHW-LOGO-SMALL  [OSHW-LOGO-SMALL]  117.73,83.19 270 bottom
U$37  OSHW-LOGO-SMALL  [OSHW-LOGO-SMALL]  13.59,96.39 270 bottom
U$38  OSHW-LOGO-SMALL  [OSHW-LOGO-SMALL]  34.42,96.39 270 bottom
U$39  OSHW-LOGO-SMALL  [OSHW-LOGO-SMALL]  55.24,96.39 270 bottom
U$40  OSHW-LOGO-SMALL  [OSHW-LOGO-SMALL]  76.07,96.39 270 bottom
U$41  OSHW-LOGO-SMALL  [OSHW-LOGO-SMALL]  96.9,96.39 270 bottom
U$42  OSHW-LOGO-SMALL  [OSHW-LOGO-SMALL]  117.73,96.39 270 bottom
U$43  OSHW-LOGO-SMALL  [OSHW-LOGO-SMALL]  13.59,109.6 270 bottom
U$44  OSHW-LOGO-SMALL  [OSHW-LOGO-SMALL]  34.42,109.6 270 bottom
U$45  OSHW-LOGO-SMALL  [OSHW-LOGO-SMALL]  55.24,109.6 270 bottom
U$46  OSHW-LOGO-SMALL  [OSHW-LOGO-SMALL]  76.07,109.6 270 bottom
U$47  OSHW-LOGO-SMALL  [OSHW-LOGO-SMALL]  96.9,109.6 270 bottom
U$48  OSHW-LOGO-SMALL  [OSHW-LOGO-SMALL]  117.73,109.6 270 bottom

## Library data of the parts
C1-C96 JP1-JP288 U1-U48 = SparkFun
E$1 = SparkFun-Retired
E$5 E$6 = SparkFun-Aesthetics
U$1-U$48 = OSHW_small

## Nets
CS: JP1.7 U1.8
CS1: JP8.7 U2.8
CS2: JP14.7 U3.8
CS3: JP20.7 U4.8
CS4: JP26.7 U5.8
CS5: JP32.7 U6.8
CS6: JP38.7 U7.8
CS7: JP44.7 U8.8
CS8: JP50.7 U9.8
CS9: JP56.7 U10.8
CS10: JP62.7 U11.8
CS11: JP68.7 U12.8
CS12: JP74.7 U13.8
CS13: JP80.7 U14.8
CS14: JP86.7 U15.8
CS15: JP92.7 U16.8
CS16: JP98.7 U17.8
CS17: JP104.7 U18.8
CS18: JP110.7 U19.8
CS19: JP116.7 U20.8
CS20: JP122.7 U21.8
CS21: JP128.7 U22.8
CS22: JP134.7 U23.8
CS23: JP140.7 U24.8
CS24: JP146.7 U25.8
CS25: JP152.7 U26.8
CS26: JP158.7 U27.8
CS27: JP164.7 U28.8
CS28: JP170.7 U29.8
CS29: JP176.7 U30.8
CS30: JP182.7 U31.8
CS31: JP188.7 U32.8
CS32: JP194.7 U33.8
CS33: JP200.7 U34.8
CS34: JP206.7 U35.8
CS35: JP212.7 U36.8
CS36: JP218.7 U37.8
CS37: JP224.7 U38.8
CS38: JP230.7 U39.8
CS39: JP236.7 U40.8
CS40: JP242.7 U41.8
CS41: JP248.7 U42.8
CS42: JP254.7 U43.8
CS43: JP260.7 U44.8
CS44: JP266.7 U45.8
CS45: JP272.7 U46.8
CS46: JP278.7 U47.8
CS47: JP284.7 U48.8
GND: C1.C C2.2 JP1.1 U1.5 U1.10 U1.12 U1.13 U1.16
GND1: C3.2 C4.C JP8.1 U2.5 U2.10 U2.12 U2.13 U2.16
GND2: C5.2 C6.C JP14.1 U3.5 U3.10 U3.12 U3.13 U3.16
GND3: C7.2 C8.C JP20.1 U4.5 U4.10 U4.12 U4.13 U4.16
GND4: C9.2 C10.C JP26.1 U5.5 U5.10 U5.12 U5.13 U5.16
GND5: C11.2 C12.C JP32.1 U6.5 U6.10 U6.12 U6.13 U6.16
GND6: C13.2 C14.C JP38.1 U7.5 U7.10 U7.12 U7.13 U7.16
GND7: C15.2 C16.C JP44.1 U8.5 U8.10 U8.12 U8.13 U8.16
GND8: C17.2 C18.C JP50.1 U9.5 U9.10 U9.12 U9.13 U9.16
GND9: C19.2 C20.C JP56.1 U10.5 U10.10 U10.12 U10.13 U10.16
GND10: C21.2 C22.C JP62.1 U11.5 U11.10 U11.12 U11.13 U11.16
GND11: C23.2 C24.C JP68.1 U12.5 U12.10 U12.12 U12.13 U12.16
GND12: C25.2 C26.C JP74.1 U13.5 U13.10 U13.12 U13.13 U13.16
GND13: C27.2 C28.C JP80.1 U14.5 U14.10 U14.12 U14.13 U14.16
GND14: C29.2 C30.C JP86.1 U15.5 U15.10 U15.12 U15.13 U15.16
GND15: C31.2 C32.C JP92.1 U16.5 U16.10 U16.12 U16.13 U16.16
GND16: C33.2 C34.C JP98.1 U17.5 U17.10 U17.12 U17.13 U17.16
GND17: C35.2 C36.C JP104.1 U18.5 U18.10 U18.12 U18.13 U18.16
GND18: C37.2 C38.C JP110.1 U19.5 U19.10 U19.12 U19.13 U19.16
GND19: C39.2 C40.C JP116.1 U20.5 U20.10 U20.12 U20.13 U20.16
GND20: C41.2 C42.C JP122.1 U21.5 U21.10 U21.12 U21.13 U21.16
GND21: C43.2 C44.C JP128.1 U22.5 U22.10 U22.12 U22.13 U22.16
GND22: C45.2 C46.C JP134.1 U23.5 U23.10 U23.12 U23.13 U23.16
GND23: C47.2 C48.C JP140.1 U24.5 U24.10 U24.12 U24.13 U24.16
GND24: C49.2 C50.C JP146.1 U25.5 U25.10 U25.12 U25.13 U25.16
GND25: C51.2 C52.C JP152.1 U26.5 U26.10 U26.12 U26.13 U26.16
GND26: C53.2 C54.C JP158.1 U27.5 U27.10 U27.12 U27.13 U27.16
GND27: C55.2 C56.C JP164.1 U28.5 U28.10 U28.12 U28.13 U28.16
GND28: C57.2 C58.C JP170.1 U29.5 U29.10 U29.12 U29.13 U29.16
GND29: C59.2 C60.C JP176.1 U30.5 U30.10 U30.12 U30.13 U30.16
GND30: C61.2 C62.C JP182.1 U31.5 U31.10 U31.12 U31.13 U31.16
GND31: C63.2 C64.C JP188.1 U32.5 U32.10 U32.12 U32.13 U32.16
GND32: C65.2 C66.C JP194.1 U33.5 U33.10 U33.12 U33.13 U33.16
GND33: C67.2 C68.C JP200.1 U34.5 U34.10 U34.12 U34.13 U34.16
GND34: C69.2 C70.C JP206.1 U35.5 U35.10 U35.12 U35.13 U35.16
GND35: C71.2 C72.C JP212.1 U36.5 U36.10 U36.12 U36.13 U36.16
GND36: C73.2 C74.C JP218.1 U37.5 U37.10 U37.12 U37.13 U37.16
GND37: C75.2 C76.C JP224.1 U38.5 U38.10 U38.12 U38.13 U38.16
GND38: C77.2 C78.C JP230.1 U39.5 U39.10 U39.12 U39.13 U39.16
GND39: C79.2 C80.C JP236.1 U40.5 U40.10 U40.12 U40.13 U40.16
GND40: C81.2 C82.C JP242.1 U41.5 U41.10 U41.12 U41.13 U41.16
GND41: C83.2 C84.C JP248.1 U42.5 U42.10 U42.12 U42.13 U42.16
GND42: C85.2 C86.C JP254.1 U43.5 U43.10 U43.12 U43.13 U43.16
GND43: C87.2 C88.C JP260.1 U44.5 U44.10 U44.12 U44.13 U44.16
GND44: C89.2 C90.C JP266.1 U45.5 U45.10 U45.12 U45.13 U45.16
GND45: C91.2 C92.C JP272.1 U46.5 U46.10 U46.12 U46.13 U46.16
GND46: C93.2 C94.C JP278.1 U47.5 U47.10 U47.12 U47.13 U47.16
GND47: C95.2 C96.C JP284.1 U48.5 U48.10 U48.12 U48.13 U48.16
INT1: JP1.3 U1.11
INT2: JP1.2 U1.9
INT3: JP8.3 U2.11
INT4: JP8.2 U2.9
INT5: JP14.3 U3.11
INT6: JP14.2 U3.9
INT7: JP20.3 U4.11
INT8: JP20.2 U4.9
INT9: JP26.3 U5.11
INT10: JP26.2 U5.9
INT11: JP32.3 U6.11
INT12: JP32.2 U6.9
INT13: JP38.3 U7.11
INT14: JP38.2 U7.9
INT15: JP44.3 U8.11
INT16: JP44.2 U8.9
INT17: JP50.3 U9.11
INT18: JP50.2 U9.9
INT19: JP56.3 U10.11
INT20: JP56.2 U10.9
INT21: JP62.3 U11.11
INT22: JP62.2 U11.9
INT23: JP68.3 U12.11
INT24: JP68.2 U12.9
INT25: JP74.3 U13.11
INT26: JP74.2 U13.9
INT27: JP80.3 U14.11
INT28: JP80.2 U14.9
INT29: JP86.3 U15.11
INT30: JP86.2 U15.9
INT31: JP92.3 U16.11
INT32: JP92.2 U16.9
INT33: JP98.3 U17.11
INT34: JP98.2 U17.9
INT35: JP104.3 U18.11
INT36: JP104.2 U18.9
INT37: JP110.3 U19.11
INT38: JP110.2 U19.9
INT39: JP116.3 U20.11
INT40: JP116.2 U20.9
INT41: JP122.3 U21.11
INT42: JP122.2 U21.9
INT43: JP128.3 U22.11
INT44: JP128.2 U22.9
INT45: JP134.3 U23.11
INT46: JP134.2 U23.9
INT47: JP140.3 U24.11
INT48: JP140.2 U24.9
INT49: JP146.3 U25.11
INT50: JP146.2 U25.9
INT51: JP152.3 U26.11
INT52: JP152.2 U26.9
INT53: JP158.3 U27.11
INT54: JP158.2 U27.9
INT55: JP164.3 U28.11
INT56: JP164.2 U28.9
INT57: JP170.3 U29.11
INT58: JP170.2 U29.9
INT59: JP176.3 U30.11
INT60: JP176.2 U30.9
INT61: JP182.3 U31.11
INT62: JP182.2 U31.9
INT63: JP188.3 U32.11
INT64: JP188.2 U32.9
INT65: JP194.3 U33.11
INT66: JP194.2 U33.9
INT67: JP200.3 U34.11
INT68: JP200.2 U34.9
INT69: JP206.3 U35.11
INT70: JP206.2 U35.9
INT71: JP212.3 U36.11
INT72: JP212.2 U36.9
INT73: JP218.3 U37.11
INT74: JP218.2 U37.9
INT75: JP224.3 U38.11
INT76: JP224.2 U38.9
INT77: JP230.3 U39.11
INT78: JP230.2 U39.9
INT79: JP236.3 U40.11
INT80: JP236.2 U40.9
INT81: JP242.3 U41.11
INT82: JP242.2 U41.9
INT83: JP248.3 U42.11
INT84: JP248.2 U42.9
INT85: JP254.3 U43.11
INT86: JP254.2 U43.9
INT87: JP260.3 U44.11
INT88: JP260.2 U44.9
INT89: JP266.3 U45.11
INT90: JP266.2 U45.9
INT91: JP272.3 U46.11
INT92: JP272.2 U46.9
INT93: JP278.3 U47.11
INT94: JP278.2 U47.9
INT95: JP284.3 U48.11
INT96: JP284.2 U48.9
SA0: JP1.6 U1.7
SA1: JP8.6 U2.7
SA2: JP14.6 U3.7
SA3: JP20.6 U4.7
SA4: JP26.6 U5.7
SA5: JP32.6 U6.7
SA6: JP38.6 U7.7
SA7: JP44.6 U8.7
SA8: JP50.6 U9.7
SA9: JP56.6 U10.7
SA10: JP62.6 U11.7
SA11: JP68.6 U12.7
SA12: JP74.6 U13.7
SA13: JP80.6 U14.7
SA14: JP86.6 U15.7
SA15: JP92.6 U16.7
SA16: JP98.6 U17.7
SA17: JP104.6 U18.7
SA18: JP110.6 U19.7
SA19: JP116.6 U20.7
SA20: JP122.6 U21.7
SA21: JP128.6 U22.7
SA22: JP134.6 U23.7
SA23: JP140.6 U24.7
SA24: JP146.6 U25.7
SA25: JP152.6 U26.7
SA26: JP158.6 U27.7
SA27: JP164.6 U28.7
SA28: JP170.6 U29.7
SA29: JP176.6 U30.7
SA30: JP182.6 U31.7
SA31: JP188.6 U32.7
SA32: JP194.6 U33.7
SA33: JP200.6 U34.7
SA34: JP206.6 U35.7
SA35: JP212.6 U36.7
SA36: JP218.6 U37.7
SA37: JP224.6 U38.7
SA38: JP230.6 U39.7
SA39: JP236.6 U40.7
SA40: JP242.6 U41.7
SA41: JP248.6 U42.7
SA42: JP254.6 U43.7
SA43: JP260.6 U44.7
SA44: JP266.6 U45.7
SA45: JP272.6 U46.7
SA46: JP278.6 U47.7
SA47: JP284.6 U48.7
SCL: JP1.5 U1.4
SCL1: JP8.5 U2.4
SCL2: JP14.5 U3.4
SCL3: JP20.5 U4.4
SCL4: JP26.5 U5.4
SCL5: JP32.5 U6.4
SCL6: JP38.5 U7.4
SCL7: JP44.5 U8.4
SCL8: JP50.5 U9.4
SCL9: JP56.5 U10.4
SCL10: JP62.5 U11.4
SCL11: JP68.5 U12.4
SCL12: JP74.5 U13.4
SCL13: JP80.5 U14.4
SCL14: JP86.5 U15.4
SCL15: JP92.5 U16.4
SCL16: JP98.5 U17.4
SCL17: JP104.5 U18.4
SCL18: JP110.5 U19.4
SCL19: JP116.5 U20.4
SCL20: JP122.5 U21.4
SCL21: JP128.5 U22.4
SCL22: JP134.5 U23.4
SCL23: JP140.5 U24.4
SCL24: JP146.5 U25.4
SCL25: JP152.5 U26.4
SCL26: JP158.5 U27.4
SCL27: JP164.5 U28.4
SCL28: JP170.5 U29.4
SCL29: JP176.5 U30.4
SCL30: JP182.5 U31.4
SCL31: JP188.5 U32.4
SCL32: JP194.5 U33.4
SCL33: JP200.5 U34.4
SCL34: JP206.5 U35.4
SCL35: JP212.5 U36.4
SCL36: JP218.5 U37.4
SCL37: JP224.5 U38.4
SCL38: JP230.5 U39.4
SCL39: JP236.5 U40.4
SCL40: JP242.5 U41.4
SCL41: JP248.5 U42.4
SCL42: JP254.5 U43.4
SCL43: JP260.5 U44.4
SCL44: JP266.5 U45.4
SCL45: JP272.5 U46.4
SCL46: JP278.5 U47.4
SCL47: JP284.5 U48.4
SDA: JP1.4 U1.6
SDA1: JP8.4 U2.6
SDA2: JP14.4 U3.6
SDA3: JP20.4 U4.6
SDA4: JP26.4 U5.6
SDA5: JP32.4 U6.6
SDA6: JP38.4 U7.6
SDA7: JP44.4 U8.6
SDA8: JP50.4 U9.6
SDA9: JP56.4 U10.6
SDA10: JP62.4 U11.6
SDA11: JP68.4 U12.6
SDA12: JP74.4 U13.6
SDA13: JP80.4 U14.6
SDA14: JP86.4 U15.6
SDA15: JP92.4 U16.6
SDA16: JP98.4 U17.6
SDA17: JP104.4 U18.6
SDA18: JP110.4 U19.6
SDA19: JP116.4 U20.6
SDA20: JP122.4 U21.6
SDA21: JP128.4 U22.6
SDA22: JP134.4 U23.6
SDA23: JP140.4 U24.6
SDA24: JP146.4 U25.6
SDA25: JP152.4 U26.6
SDA26: JP158.4 U27.6
SDA27: JP164.4 U28.6
SDA28: JP170.4 U29.6
SDA29: JP176.4 U30.6
SDA30: JP182.4 U31.6
SDA31: JP188.4 U32.6
SDA32: JP194.4 U33.6
SDA33: JP200.4 U34.6
SDA34: JP206.4 U35.6
SDA35: JP212.4 U36.6
SDA36: JP218.4 U37.6
SDA37: JP224.4 U38.6
SDA38: JP230.4 U39.6
SDA39: JP236.4 U40.6
SDA40: JP242.4 U41.6
SDA41: JP248.4 U42.6
SDA42: JP254.4 U43.6
SDA43: JP260.4 U44.6
SDA44: JP266.4 U45.6
SDA45: JP272.4 U46.6
SDA46: JP278.4 U47.6
SDA47: JP284.4 U48.6
VCC: C1.A C2.1 JP1.8 U1.1 U1.14 U1.15
VCC1: C3.1 C4.A JP8.8 U2.1 U2.14 U2.15
VCC2: C5.1 C6.A JP14.8 U3.1 U3.14 U3.15
VCC3: C7.1 C8.A JP20.8 U4.1 U4.14 U4.15
VCC4: C9.1 C10.A JP26.8 U5.1 U5.14 U5.15
VCC5: C11.1 C12.A JP32.8 U6.1 U6.14 U6.15
VCC6: C13.1 C14.A JP38.8 U7.1 U7.14 U7.15
VCC7: C15.1 C16.A JP44.8 U8.1 U8.14 U8.15
VCC8: C17.1 C18.A JP50.8 U9.1 U9.14 U9.15
VCC9: C19.1 C20.A JP56.8 U10.1 U10.14 U10.15
VCC10: C21.1 C22.A JP62.8 U11.1 U11.14 U11.15
VCC11: C23.1 C24.A JP68.8 U12.1 U12.14 U12.15
VCC12: C25.1 C26.A JP74.8 U13.1 U13.14 U13.15
VCC13: C27.1 C28.A JP80.8 U14.1 U14.14 U14.15
VCC14: C29.1 C30.A JP86.8 U15.1 U15.14 U15.15
VCC15: C31.1 C32.A JP92.8 U16.1 U16.14 U16.15
VCC16: C33.1 C34.A JP98.8 U17.1 U17.14 U17.15
VCC17: C35.1 C36.A JP104.8 U18.1 U18.14 U18.15
VCC18: C37.1 C38.A JP110.8 U19.1 U19.14 U19.15
VCC19: C39.1 C40.A JP116.8 U20.1 U20.14 U20.15
VCC20: C41.1 C42.A JP122.8 U21.1 U21.14 U21.15
VCC21: C43.1 C44.A JP128.8 U22.1 U22.14 U22.15
VCC22: C45.1 C46.A JP134.8 U23.1 U23.14 U23.15
VCC23: C47.1 C48.A JP140.8 U24.1 U24.14 U24.15
VCC24: C49.1 C50.A JP146.8 U25.1 U25.14 U25.15
VCC25: C51.1 C52.A JP152.8 U26.1 U26.14 U26.15
VCC26: C53.1 C54.A JP158.8 U27.1 U27.14 U27.15
VCC27: C55.1 C56.A JP164.8 U28.1 U28.14 U28.15
VCC28: C57.1 C58.A JP170.8 U29.1 U29.14 U29.15
VCC29: C59.1 C60.A JP176.8 U30.1 U30.14 U30.15
VCC30: C61.1 C62.A JP182.8 U31.1 U31.14 U31.15
VCC31: C63.1 C64.A JP188.8 U32.1 U32.14 U32.15
VCC32: C65.1 C66.A JP194.8 U33.1 U33.14 U33.15
VCC33: C67.1 C68.A JP200.8 U34.1 U34.14 U34.15
VCC34: C69.1 C70.A JP206.8 U35.1 U35.14 U35.15
VCC35: C71.1 C72.A JP212.8 U36.1 U36.14 U36.15
VCC36: C73.1 C74.A JP218.8 U37.1 U37.14 U37.15
VCC37: C75.1 C76.A JP224.8 U38.1 U38.14 U38.15
VCC38: C77.1 C78.A JP230.8 U39.1 U39.14 U39.15
VCC39: C79.1 C80.A JP236.8 U40.1 U40.14 U40.15
VCC40: C81.1 C82.A JP242.8 U41.1 U41.14 U41.15
VCC41: C83.1 C84.A JP248.8 U42.1 U42.14 U42.15
VCC42: C85.1 C86.A JP254.8 U43.1 U43.14 U43.15
VCC43: C87.1 C88.A JP260.8 U44.1 U44.14 U44.15
VCC44: C89.1 C90.A JP266.8 U45.1 U45.14 U45.15
VCC45: C91.1 C92.A JP272.8 U46.1 U46.14 U46.15
VCC46: C93.1 C94.A JP278.8 U47.1 U47.14 U47.15
VCC47: C95.1 C96.A JP284.8 U48.1 U48.14 U48.15

## Tracks (layer width: path | path; a pad name or v marks a point on that pad's centre or on a via)
CS  (via drill 0.51)
  Top 0.254: U1.8 19.55,13.71 v19.68,13.72
  Bottom 0.254: 10.67,8.15 JP1.7 16.26,13.72 v19.68,13.72
CS1  (via drill 0.51)
  Top 0.254: U2.8 40.38,13.71 v40.51,13.72
  Bottom 0.254: 31.5,8.15 JP8.7 37.08,13.72 v40.51,13.72
CS2  (via drill 0.51)
  Top 0.254: U3.8 61.21,13.71 v61.34,13.72
  Bottom 0.254: 52.32,8.15 JP14.7 57.91,13.72 v61.34,13.72
CS3  (via drill 0.51)
  Top 0.254: U4.8 82.03,13.71 v82.17,13.72
  Bottom 0.254: 73.15,8.15 JP20.7 78.74,13.72 v82.17,13.72
CS4  (via drill 0.51)
  Top 0.254: U5.8 102.86,13.71 v103,13.72
  Bottom 0.254: 93.98,8.15 JP26.7 99.57,13.72 v103,13.72
CS5  (via drill 0.51)
  Top 0.254: U6.8 123.69,13.71 v123.83,13.72
  Bottom 0.254: 114.81,8.15 JP32.7 120.4,13.72 v123.83,13.72
CS6  (via drill 0.51)
  Top 0.254: U7.8 19.55,26.92 v19.68,26.92
  Bottom 0.254: 10.67,21.36 JP38.7 16.26,26.92 v19.68,26.92
CS7  (via drill 0.51)
  Top 0.254: U8.8 40.38,26.92 v40.51,26.92
  Bottom 0.254: 31.5,21.36 JP44.7 37.08,26.92 v40.51,26.92
CS8  (via drill 0.51)
  Top 0.254: U9.8 61.21,26.92 v61.34,26.92
  Bottom 0.254: 52.32,21.36 JP50.7 57.91,26.92 v61.34,26.92
CS9  (via drill 0.51)
  Top 0.254: U10.8 82.03,26.92 v82.17,26.92
  Bottom 0.254: 73.15,21.36 JP56.7 78.74,26.92 v82.17,26.92
CS10  (via drill 0.51)
  Top 0.254: U11.8 102.86,26.92 v103,26.92
  Bottom 0.254: 93.98,21.36 JP62.7 99.57,26.92 v103,26.92
CS11  (via drill 0.51)
  Top 0.254: U12.8 123.69,26.92 v123.83,26.92
  Bottom 0.254: 114.81,21.36 JP68.7 120.4,26.92 v123.83,26.92
CS12  (via drill 0.51)
  Top 0.254: U13.8 19.55,40.12 v19.68,40.13
  Bottom 0.254: 10.67,34.57 JP74.7 16.26,40.13 v19.68,40.13
CS13  (via drill 0.51)
  Top 0.254: U14.8 40.38,40.12 v40.51,40.13
  Bottom 0.254: 31.5,34.57 JP80.7 37.08,40.13 v40.51,40.13
CS14  (via drill 0.51)
  Top 0.254: U15.8 61.21,40.12 v61.34,40.13
  Bottom 0.254: 52.32,34.57 JP86.7 57.91,40.13 v61.34,40.13
CS15  (via drill 0.51)
  Top 0.254: U16.8 82.03,40.12 v82.17,40.13
  Bottom 0.254: 73.15,34.57 JP92.7 78.74,40.13 v82.17,40.13
CS16  (via drill 0.51)
  Top 0.254: U17.8 102.86,40.12 v103,40.13
  Bottom 0.254: 93.98,34.57 JP98.7 99.57,40.13 v103,40.13
CS17  (via drill 0.51)
  Top 0.254: U18.8 123.69,40.12 v123.83,40.13
  Bottom 0.254: 114.81,34.57 JP104.7 120.4,40.13 v123.83,40.13
CS18  (via drill 0.51)
  Top 0.254: U19.8 19.55,53.33 v19.68,53.34
  Bottom 0.254: 10.67,47.78 JP110.7 16.26,53.34 v19.68,53.34
CS19  (via drill 0.51)
  Top 0.254: U20.8 40.38,53.33 v40.51,53.34
  Bottom 0.254: 31.5,47.78 JP116.7 37.08,53.34 v40.51,53.34
CS20  (via drill 0.51)
  Top 0.254: U21.8 61.21,53.33 v61.34,53.34
  Bottom 0.254: 52.32,47.78 JP122.7 57.91,53.34 v61.34,53.34
CS21  (via drill 0.51)
  Top 0.254: U22.8 82.03,53.33 v82.17,53.34
  Bottom 0.254: 73.15,47.78 JP128.7 78.74,53.34 v82.17,53.34
CS22  (via drill 0.51)
  Top 0.254: U23.8 102.86,53.33 v103,53.34
  Bottom 0.254: 93.98,47.78 JP134.7 99.57,53.34 v103,53.34
CS23  (via drill 0.51)
  Top 0.254: U24.8 123.69,53.33 v123.83,53.34
  Bottom 0.254: 114.81,47.78 JP140.7 120.4,53.34 v123.83,53.34
CS24  (via drill 0.51)
  Top 0.254: U25.8 19.55,66.54 v19.68,66.55
  Bottom 0.254: 10.67,60.98 JP146.7 16.26,66.55 v19.68,66.55
CS25  (via drill 0.51)
  Top 0.254: U26.8 40.38,66.54 v40.51,66.55
  Bottom 0.254: 31.5,60.98 JP152.7 37.08,66.55 v40.51,66.55
CS26  (via drill 0.51)
  Top 0.254: U27.8 61.21,66.54 v61.34,66.55
  Bottom 0.254: 52.32,60.98 JP158.7 57.91,66.55 v61.34,66.55
CS27  (via drill 0.51)
  Top 0.254: U28.8 82.03,66.54 v82.17,66.55
  Bottom 0.254: 73.15,60.98 JP164.7 78.74,66.55 v82.17,66.55
CS28  (via drill 0.51)
  Top 0.254: U29.8 102.86,66.54 v103,66.55
  Bottom 0.254: 93.98,60.98 JP170.7 99.57,66.55 v103,66.55
CS29  (via drill 0.51)
  Top 0.254: U30.8 123.69,66.54 v123.83,66.55
  Bottom 0.254: 114.81,60.98 JP176.7 120.4,66.55 v123.83,66.55
CS30  (via drill 0.51)
  Top 0.254: U31.8 19.55,79.75 v19.68,79.76
  Bottom 0.254: 10.67,74.19 JP182.7 16.26,79.76 v19.68,79.76
CS31  (via drill 0.51)
  Top 0.254: U32.8 40.38,79.75 v40.51,79.76
  Bottom 0.254: 31.5,74.19 JP188.7 37.08,79.76 v40.51,79.76
CS32  (via drill 0.51)
  Top 0.254: U33.8 61.21,79.75 v61.34,79.76
  Bottom 0.254: 52.32,74.19 JP194.7 57.91,79.76 v61.34,79.76
CS33  (via drill 0.51)
  Top 0.254: U34.8 82.03,79.75 v82.17,79.76
  Bottom 0.254: 73.15,74.19 JP200.7 78.74,79.76 v82.17,79.76
CS34  (via drill 0.51)
  Top 0.254: U35.8 102.86,79.75 v103,79.76
  Bottom 0.254: 93.98,74.19 JP206.7 99.57,79.76 v103,79.76
CS35  (via drill 0.51)
  Top 0.254: U36.8 123.69,79.75 v123.83,79.76
  Bottom 0.254: 114.81,74.19 JP212.7 120.4,79.76 v123.83,79.76
CS36  (via drill 0.51)
  Top 0.254: U37.8 19.55,92.96 v19.68,92.96
  Bottom 0.254: 10.67,87.4 JP218.7 16.26,92.96 v19.68,92.96
CS37  (via drill 0.51)
  Top 0.254: U38.8 40.38,92.96 v40.51,92.96
  Bottom 0.254: 31.5,87.4 JP224.7 37.08,92.96 v40.51,92.96
CS38  (via drill 0.51)
  Top 0.254: U39.8 61.21,92.96 v61.34,92.96
  Bottom 0.254: 52.32,87.4 JP230.7 57.91,92.96 v61.34,92.96
CS39  (via drill 0.51)
  Top 0.254: U40.8 82.03,92.96 v82.17,92.96
  Bottom 0.254: 73.15,87.4 JP236.7 78.74,92.96 v82.17,92.96
CS40  (via drill 0.51)
  Top 0.254: U41.8 102.86,92.96 v103,92.96
  Bottom 0.254: 93.98,87.4 JP242.7 99.57,92.96 v103,92.96
CS41  (via drill 0.51)
  Top 0.254: U42.8 123.69,92.96 v123.83,92.96
  Bottom 0.254: 114.81,87.4 JP248.7 120.4,92.96 v123.83,92.96
CS42  (via drill 0.51)
  Top 0.254: U43.8 19.55,106.16 v19.68,106.17
  Bottom 0.254: 10.67,100.61 JP254.7 16.26,106.17 v19.68,106.17
CS43  (via drill 0.51)
  Top 0.254: U44.8 40.38,106.16 v40.51,106.17
  Bottom 0.254: 31.5,100.61 JP260.7 37.08,106.17 v40.51,106.17
CS44  (via drill 0.51)
  Top 0.254: U45.8 61.21,106.16 v61.34,106.17
  Bottom 0.254: 52.32,100.61 JP266.7 57.91,106.17 v61.34,106.17
CS45  (via drill 0.51)
  Top 0.254: U46.8 82.03,106.16 v82.17,106.17
  Bottom 0.254: 73.15,100.61 JP272.7 78.74,106.17 v82.17,106.17
CS46  (via drill 0.51)
  Top 0.254: U47.8 102.86,106.16 v103,106.17
  Bottom 0.254: 93.98,100.61 JP278.7 99.57,106.17 v103,106.17
CS47  (via drill 0.51)
  Top 0.254: U48.8 123.69,106.16 v123.83,106.17
  Bottom 0.254: 114.81,100.61 JP284.7 120.4,106.17 v123.83,106.17
GND  (via drill 0.51)
  Top 0.254: U1.16 14.87,12.71 14.86,12.7 | 15.75,15.75 16.02,15.48 U1.13 U1.12 | 17.8,15.6 17.52,15.31 U1.10 17.52,15.36 17.65,15.49 18.92,15.49 v19.05,15.62 | U1.12 15.36,14.61 15.24,14.73 v15.24,15.62 15.37,15.49 15.37,14.73 15.49,14.61 U1.12 | U1.5 18.02,10.4 v17.14,9.78
  other vias: 9.4,12.19
  pour Top (isolate 0.406): 6.86,19.56 6.86,6.86 27.18,6.86 27.18,19.56
  pour Bottom (isolate 0.406): 6.86,19.56 6.86,6.86 27.18,6.86 27.18,19.56
GND1  (via drill 0.51)
  Top 0.254: U2.16 35.7,12.71 35.69,12.7 | 36.58,15.75 36.85,15.48 U2.13 U2.12 | 38.63,15.6 38.35,15.31 U2.10 38.35,15.36 38.48,15.49 39.75,15.49 v39.88,15.62 | U2.12 36.19,14.61 36.07,14.73 v36.07,15.62 36.2,15.49 36.2,14.73 36.32,14.61 U2.12 | U2.5 38.85,10.4 v37.97,9.78
  other vias: 30.23,12.19
  pour Top (isolate 0.406): 27.69,19.56 27.69,6.86 48.01,6.86 48.01,19.56
  pour Bottom (isolate 0.406): 27.69,19.56 27.69,6.86 48.01,6.86 48.01,19.56
GND2  (via drill 0.51)
  Top 0.254: U3.16 56.52,12.71 56.52,12.7 | 57.4,15.75 57.67,15.48 U3.13 U3.12 | 59.46,15.6 59.17,15.31 U3.10 59.17,15.36 59.31,15.49 60.58,15.49 v60.71,15.62 | U3.12 57.02,14.61 56.9,14.73 v56.9,15.62 57.02,15.49 57.02,14.73 57.15,14.61 U3.12 | U3.5 59.67,10.4 v58.8,9.78
  other vias: 51.05,12.19
  pour Top (isolate 0.406): 48.51,19.56 48.51,6.86 68.83,6.86 68.83,19.56
  pour Bottom (isolate 0.406): 48.51,19.56 48.51,6.86 68.83,6.86 68.83,19.56
GND3  (via drill 0.51)
  Top 0.254: U4.16 77.35,12.71 77.34,12.7 | 78.23,15.75 78.5,15.48 U4.13 U4.12 | 80.29,15.6 80,15.31 U4.10 80,15.36 80.14,15.49 81.41,15.49 v81.53,15.62 | U4.12 77.85,14.61 77.72,14.73 v77.72,15.62 77.85,15.49 77.85,14.73 77.97,14.61 U4.12 | U4.5 80.5,10.4 v79.63,9.78
  other vias: 71.88,12.19
  pour Top (isolate 0.406): 69.34,19.56 69.34,6.86 89.66,6.86 89.66,19.56
  pour Bottom (isolate 0.406): 69.34,19.56 69.34,6.86 89.66,6.86 89.66,19.56
GND4  (via drill 0.51)
  Top 0.254: U5.16 98.18,12.71 98.17,12.7 | 99.06,15.75 99.33,15.48 U5.13 U5.12 | 101.12,15.6 100.83,15.31 U5.10 100.83,15.36 100.97,15.49 102.23,15.49 v102.36,15.62 | U5.12 98.68,14.61 98.55,14.73 v98.55,15.62 98.68,15.49 98.68,14.73 98.8,14.61 U5.12 | U5.5 101.33,10.4 v100.46,9.78
  other vias: 92.71,12.19
  pour Top (isolate 0.406): 90.17,19.56 90.17,6.86 110.49,6.86 110.49,19.56
  pour Bottom (isolate 0.406): 90.17,19.56 90.17,6.86 110.49,6.86 110.49,19.56
GND5  (via drill 0.51)
  Top 0.254: U6.16 119.01,12.71 119,12.7 | 119.89,15.75 120.16,15.48 U6.13 U6.12 | 121.94,15.6 121.66,15.31 U6.10 121.66,15.36 121.79,15.49 123.06,15.49 v123.19,15.62 | U6.12 119.5,14.61 119.38,14.73 v119.38,15.62 119.51,15.49 119.51,14.73 119.63,14.61 U6.12 | U6.5 122.16,10.4 v121.28,9.78
  other vias: 113.54,12.19
  pour Top (isolate 0.406): 111,19.56 111,6.86 131.32,6.86 131.32,19.56
  pour Bottom (isolate 0.406): 111,19.56 111,6.86 131.32,6.86 131.32,19.56
GND6  (via drill 0.51)
  Top 0.254: U7.16 14.87,25.92 14.86,25.91 | 15.75,28.96 16.02,28.69 U7.13 U7.12 | 17.8,28.8 17.52,28.52 U7.10 17.52,28.57 17.65,28.7 18.92,28.7 v19.05,28.83 | U7.12 15.36,27.82 15.24,27.94 v15.24,28.83 15.37,28.7 15.37,27.94 15.49,27.82 U7.12 | U7.5 18.02,23.61 v17.14,22.99
  other vias: 9.4,25.4
  pour Top (isolate 0.406): 6.86,32.77 6.86,20.07 27.18,20.07 27.18,32.77
  pour Bottom (isolate 0.406): 6.86,32.77 6.86,20.07 27.18,20.07 27.18,32.77
GND7  (via drill 0.51)
  Top 0.254: U8.16 35.7,25.92 35.69,25.91 | 36.58,28.96 36.85,28.69 U8.13 U8.12 | 38.63,28.8 38.35,28.52 U8.10 38.35,28.57 38.48,28.7 39.75,28.7 v39.88,28.83 | U8.12 36.19,27.82 36.07,27.94 v36.07,28.83 36.2,28.7 36.2,27.94 36.32,27.82 U8.12 | U8.5 38.85,23.61 v37.97,22.99
  other vias: 30.23,25.4
  pour Top (isolate 0.406): 27.69,32.77 27.69,20.07 48.01,20.07 48.01,32.77
  pour Bottom (isolate 0.406): 27.69,32.77 27.69,20.07 48.01,20.07 48.01,32.77
GND8  (via drill 0.51)
  Top 0.254: U9.16 56.52,25.92 56.52,25.91 | 57.4,28.96 57.67,28.69 U9.13 U9.12 | 59.46,28.8 59.17,28.52 U9.10 59.17,28.57 59.31,28.7 60.58,28.7 v60.71,28.83 | U9.12 57.02,27.82 56.9,27.94 v56.9,28.83 57.02,28.7 57.02,27.94 57.15,27.82 U9.12 | U9.5 59.67,23.61 v58.8,22.99
  other vias: 51.05,25.4
  pour Top (isolate 0.406): 48.51,32.77 48.51,20.07 68.83,20.07 68.83,32.77
  pour Bottom (isolate 0.406): 48.51,32.77 48.51,20.07 68.83,20.07 68.83,32.77
GND9  (via drill 0.51)
  Top 0.254: U10.16 77.35,25.92 77.34,25.91 | 78.23,28.96 78.5,28.69 U10.13 U10.12 | 80.29,28.8 80,28.52 U10.10 80,28.57 80.14,28.7 81.41,28.7 v81.53,28.83 | U10.12 77.85,27.82 77.72,27.94 v77.72,28.83 77.85,28.7 77.85,27.94 77.97,27.82 U10.12 | U10.5 80.5,23.61 v79.63,22.99
  other vias: 71.88,25.4
  pour Top (isolate 0.406): 69.34,32.77 69.34,20.07 89.66,20.07 89.66,32.77
  pour Bottom (isolate 0.406): 69.34,32.77 69.34,20.07 89.66,20.07 89.66,32.77
GND10  (via drill 0.51)
  Top 0.254: U11.16 98.18,25.92 98.17,25.91 | 99.06,28.96 99.33,28.69 U11.13 U11.12 | 101.12,28.8 100.83,28.52 U11.10 100.83,28.57 100.97,28.7 102.23,28.7 v102.36,28.83 | U11.12 98.68,27.82 98.55,27.94 v98.55,28.83 98.68,28.7 98.68,27.94 98.8,27.82 U11.12 | U11.5 101.33,23.61 v100.46,22.99
  other vias: 92.71,25.4
  pour Top (isolate 0.406): 90.17,32.77 90.17,20.07 110.49,20.07 110.49,32.77
  pour Bottom (isolate 0.406): 90.17,32.77 90.17,20.07 110.49,20.07 110.49,32.77
GND11  (via drill 0.51)
  Top 0.254: U12.16 119.01,25.92 119,25.91 | 119.89,28.96 120.16,28.69 U12.13 U12.12 | 121.94,28.8 121.66,28.52 U12.10 121.66,28.57 121.79,28.7 123.06,28.7 v123.19,28.83 | U12.12 119.5,27.82 119.38,27.94 v119.38,28.83 119.51,28.7 119.51,27.94 119.63,27.82 U12.12 | U12.5 122.16,23.61 v121.28,22.99
  other vias: 113.54,25.4
  pour Top (isolate 0.406): 111,32.77 111,20.07 131.32,20.07 131.32,32.77
  pour Bottom (isolate 0.406): 111,32.77 111,20.07 131.32,20.07 131.32,32.77
GND12  (via drill 0.51)
  Top 0.254: U13.16 14.87,39.12 14.86,39.12 | 15.75,42.16 16.02,41.89 U13.13 U13.12 | 17.8,42.01 17.52,41.72 U13.10 17.52,41.77 17.65,41.91 18.92,41.91 v19.05,42.04 | U13.12 15.36,41.02 15.24,41.15 v15.24,42.04 15.37,41.91 15.37,41.15 15.49,41.02 U13.12 | U13.5 18.02,36.81 v17.14,36.2
  other vias: 9.4,38.61
  pour Top (isolate 0.406): 6.86,45.97 6.86,33.27 27.18,33.27 27.18,45.97
  pour Bottom (isolate 0.406): 6.86,45.97 6.86,33.27 27.18,33.27 27.18,45.97
GND13  (via drill 0.51)
  Top 0.254: U14.16 35.7,39.12 35.69,39.12 | 36.58,42.16 36.85,41.89 U14.13 U14.12 | 38.63,42.01 38.35,41.72 U14.10 38.35,41.77 38.48,41.91 39.75,41.91 v39.88,42.04 | U14.12 36.19,41.02 36.07,41.15 v36.07,42.04 36.2,41.91 36.2,41.15 36.32,41.02 U14.12 | U14.5 38.85,36.81 v37.97,36.2
  other vias: 30.23,38.61
  pour Top (isolate 0.406): 27.69,45.97 27.69,33.27 48.01,33.27 48.01,45.97
  pour Bottom (isolate 0.406): 27.69,45.97 27.69,33.27 48.01,33.27 48.01,45.97
GND14  (via drill 0.51)
  Top 0.254: U15.16 56.52,39.12 | 57.4,42.16 57.67,41.89 U15.13 U15.12 | 59.46,42.01 59.17,41.72 U15.10 59.17,41.77 59.31,41.91 60.58,41.91 v60.71,42.04 | U15.12 57.02,41.02 56.9,41.15 v56.9,42.04 57.02,41.91 57.02,41.15 57.15,41.02 U15.12 | U15.5 59.67,36.81 v58.8,36.2
  other vias: 51.05,38.61
  pour Top (isolate 0.406): 48.51,45.97 48.51,33.27 68.83,33.27 68.83,45.97
  pour Bottom (isolate 0.406): 48.51,45.97 48.51,33.27 68.83,33.27 68.83,45.97
GND15  (via drill 0.51)
  Top 0.254: U16.16 77.35,39.12 77.34,39.12 | 78.23,42.16 78.5,41.89 U16.13 U16.12 | 80.29,42.01 80,41.72 U16.10 80,41.77 80.14,41.91 81.41,41.91 v81.53,42.04 | U16.12 77.85,41.02 77.72,41.15 v77.72,42.04 77.85,41.91 77.85,41.15 77.97,41.02 U16.12 | U16.5 80.5,36.81 v79.63,36.2
  other vias: 71.88,38.61